# Altium PCB cs301_4--4 holes.PcbDoc
Units mm, origin at the board's own origin, x right, y up, seen from the top; angles counter-clockwise.
Board outline 274.95 x 168.53 mm, 2 copper layers (Top Layer, Bottom Layer); 70 components, 49 nets, 236 pads, 24 vias.
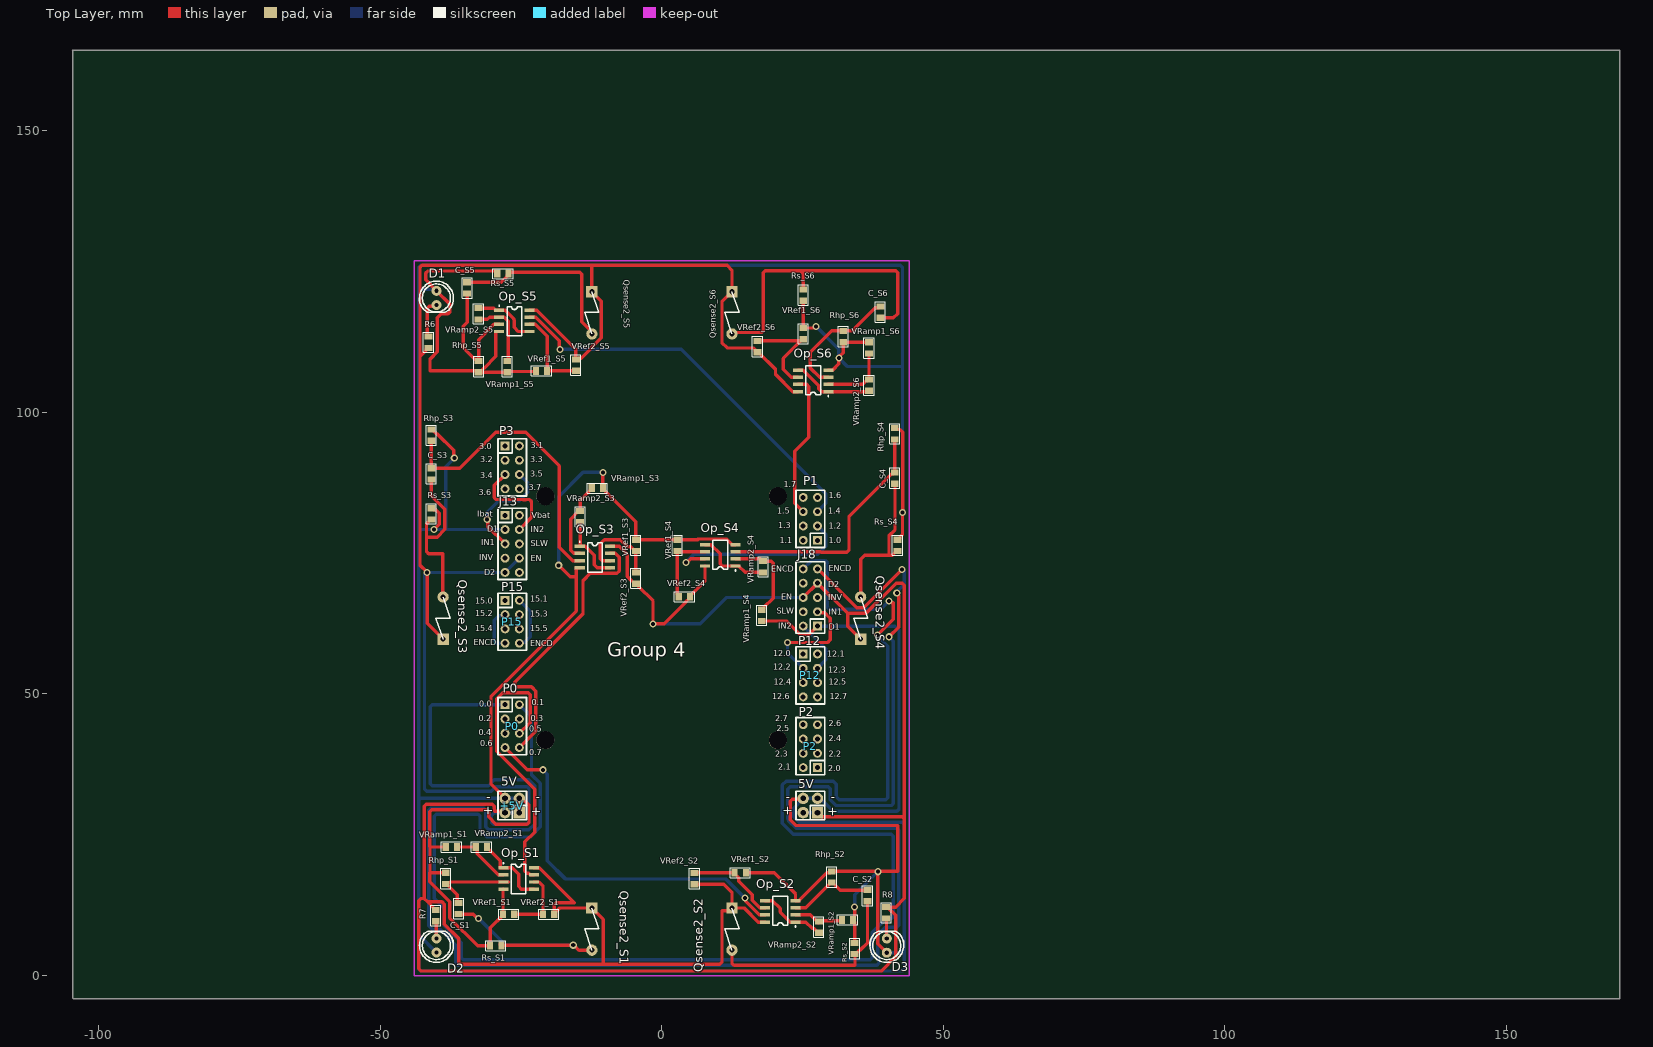
[diagram p0: Top Layer view]
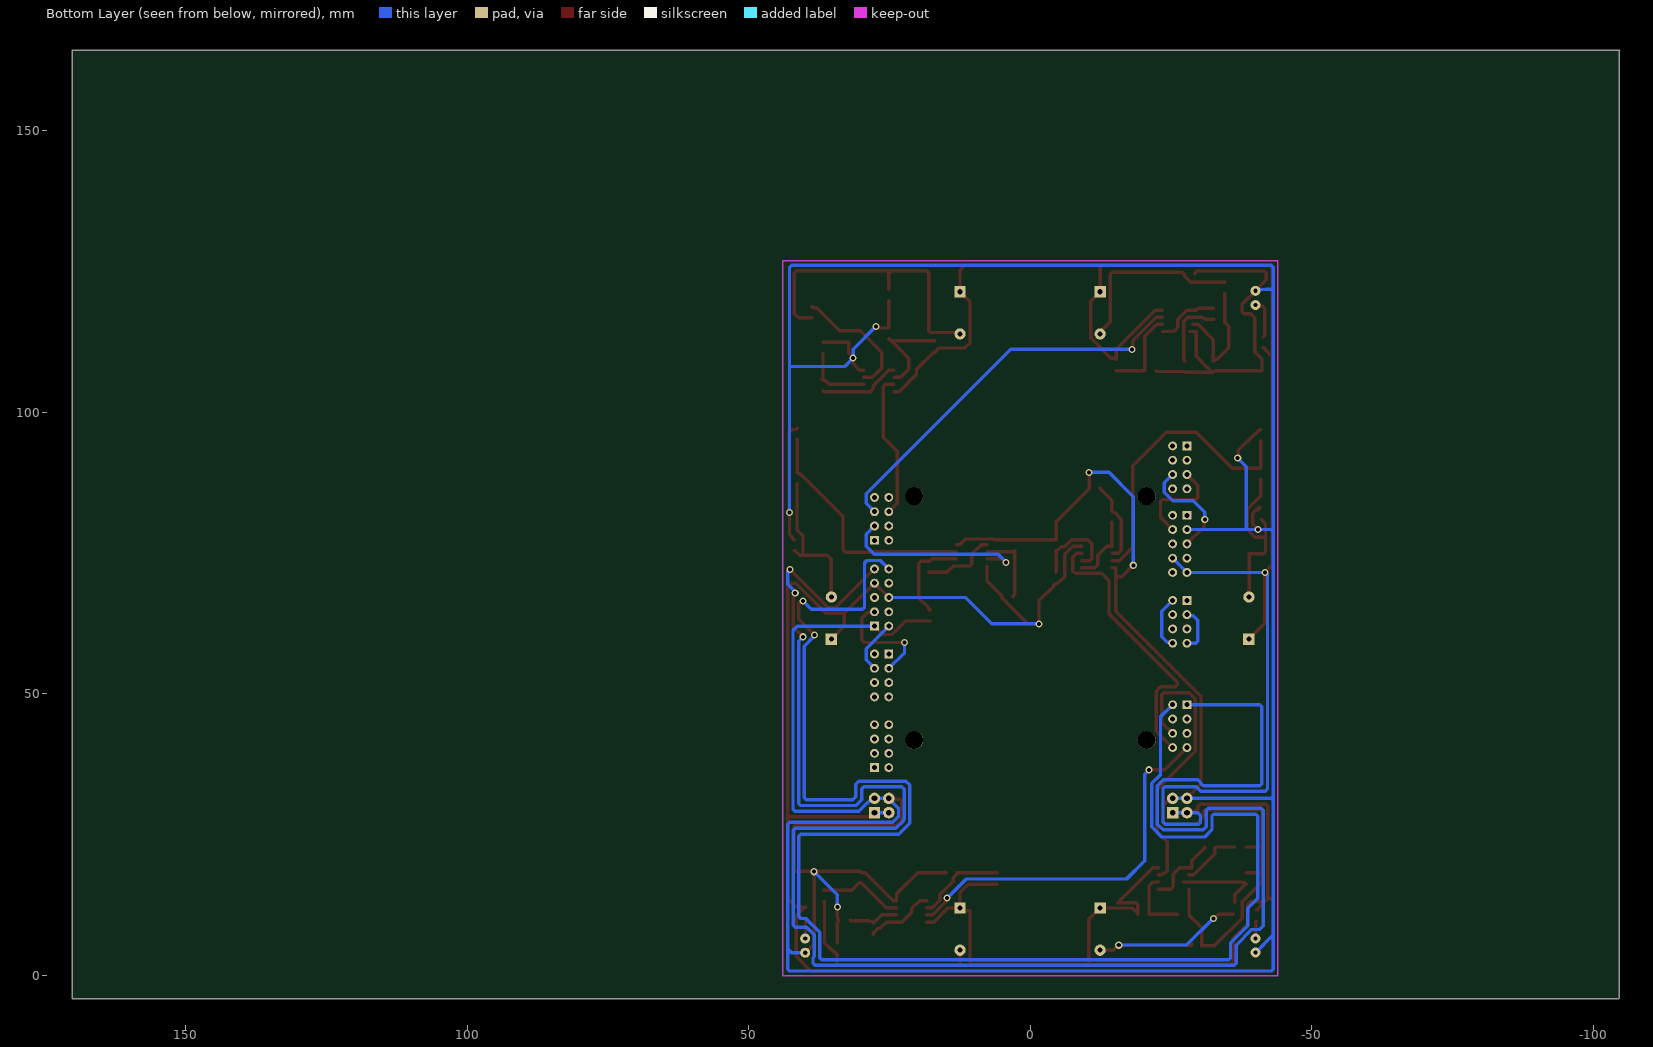
[diagram p1: Bottom Layer view, seen from below]

## Layer stack, top to bottom
Top Solder: solder mask 0.0102, Solder Resist, Dk 3.5
Top Layer: signal copper 0.0356
Dielectric1: dielectric 0.32, FR-4, Dk 4.8
Bottom Layer: signal copper 0.0356
Bottom Solder: solder mask 0.0102, Solder Resist, Dk 3.5

## Board outline
-104.648,-4.064 -104.521,-4.191 170.18,-4.191 170.18,164.338 -104.775,164.338 -104.648,164.211 -104.648,-4.064

## Design rules (kind name [scope] priority, off if disabled: settings)
Clearance [All] p1: gap=0.4 ignorepadtopadclearanceinfootprint=FALSE
Height [All] p1: minheight=0 maxheight=20 prefheight=12.7
HoleSize [All] p1: absolutevalues=TRUE maxlimit=10 minlimit=0.4 maxpercent=80.000 minpercent=20.000
PolygonConnect [All] p1: connectstyle=Relief reliefconductorwidth=0.6 reliefentries=4 polygonreliefangle="90 Angle" airgapwidth=0.4
RoutingVias [All] p1: holewidth=0.711 width=1.27 viastyle="Through Hole" minholewidth=0.711 minwidth=1.27 maxholewidth=0.711 maxwidth=1.27
SilkToSilkClearance [All] p1: silktosilkclearance=0.1
SilkToSolderMaskClearance SilkscreenOverComponentPads [IsPad] p1: minsilkscreentomaskgap=0.1 clearancetoexposedcopper=TRUE
SolderMaskExpansion [All] p1: expansion=0.102 istentingtop=FALSE
Width [All] p1: maxlimit=10 minlimit=0.4 preferedwidth=0.6
26 further rules are at their usual default settings.

## Classes and differential pairs
component class S6: C_S6 Oa12_S6 Op_S6 Qsense2_S6 Rhp_S6 Rs_S6 VRamp1_S6 VRamp2_S6 VRef1_S6 VRef2_S6
component class S5: C_S5 Oa12_S5 Op_S5 Qsense2_S5 Rhp_S5 Rs_S5 VRamp1_S5 VRamp2_S5 VRef1_S5 VRef2_S5
component class S4: C_S4 Oa12_S4 Op_S4 Qsense2_S4 Rhp_S4 Rs_S4 VRamp1_S4 VRamp2_S4 VRef1_S4 VRef2_S4
component class S3: C_S3 Oa12_S3 Op_S3 Qsense2_S3 Rhp_S3 Rs_S3 VRamp1_S3 VRamp2_S3 VRef1_S3 VRef2_S3
component class S2: C_S2 Oa12_S2 Op_S2 Qsense2_S2 Rhp_S2 Rs_S2 VRamp1_S2 VRamp2_S2 VRef1_S2 VRef2_S2
component class S1: C_S1 Oa12_S1 Op_S1 Qsense2_S1 Rhp_S1 Rs_S1 VRamp1_S1 VRamp2_S1 VRef1_S1 VRef2_S1
channel class SensorDesign: S1 S2 S3 S4 S5 S6
component class cs301_4---------------: 5V +5V D1 D2 D3 J13 J18 P0 P1 P2 P3 P12 P15 R6 R7 R8

## Components (designator, comment, footprint, x,y, rotation, side; value= is the part's Value field where it differs from the comment)
5V "5V" IDC4 27.638,28.872 r90 top locked
+5V "5V" IDC4 -25.321,28.872 r90 top locked
C_S1 "680n" "0805 CAP" -36.116,11.854 r90 top (schematic designator C)
C_S2 "680n" "0805 CAP" 36.528,14.124 r90 top (schematic designator C)
C_S3 "680n" "0805 CAP" -40.942,89.07 r90 top (schematic designator C)
C_S4 "680n" "0805 CAP" 41.354,88.308 r90 top (schematic designator C)
C_S5 "680n" "0805 CAP" -34.592,122.09 r270 top (schematic designator C)
C_S6 "680n" "0805 CAP" 38.814,117.788 r90 top (schematic designator C)
D1 "LED" LED0.1/5MM#1 -40.048,119.036 r180 top locked
D2 "LED" LED0.1/5MM#2 -40.048,6.536 r0 top locked
D3 "LED" LED0.1/5MM#1 39.952,6.536 r0 top locked
J13 "CON10" IDC10 -27.861,81.704 r270 top locked
J18 "CON10" IDC10 27.638,62.019 r90 top locked
Op_S1 "LM358" "SO - 8" -25.448,17.188 r0 top (schematic designator Op)
Op_S2 "LM358" "SO - 8" 21.034,11.346 r180 top (schematic designator Op)
Op_S3 "LM358" "SO - 8" -11.902,74.29 r0 top (schematic designator Op)
Op_S4 "LM358" "SO - 8" 10.366,74.592 r180 top (schematic designator Op)
Op_S5 "LM358" "SO - 8" -26.21,116.248 r0 top (schematic designator Op)
Op_S6 "LM358" "SO - 8" 26.876,105.58 r180 top (schematic designator Op)
P0 "P0" idc8 -27.861,48.049 r270 top locked
P1 "P1" idc8 27.638,77.259 r90 top locked
P2 "P2" idc8 27.638,36.873 r90 top locked
P3 "P3" idc8 -27.861,94.023 r270 top locked
P12 "P12" idc8 25.098,57.066 r270 top locked
P15 "P15" IDC8 -27.861,66.591 r270 top locked
Qsense2_S1 "VEMT3700" VEMT3700 -16.256,14.478 r270 top (schematic designator Qsense2)
Qsense2_S2 "VEMT3700" VEMT3700 8.636,14.478 r270 top (schematic designator Qsense2)
Qsense2_S3 "VEMT3700" VEMT3700 -35.052,57.15 r90 top (schematic designator Qsense2)
Qsense2_S4 "VEMT3700" VEMT3700 39.116,57.15 r90 top (schematic designator Qsense2)
Qsense2_S5 "VEMT3700" VEMT3700 -16.256,123.952 r270 top (schematic designator Qsense2)
Qsense2_S6 "VEMT3700" VEMT3700 8.636,123.952 r270 top (schematic designator Qsense2)
R6 "1k" "0805 RES" -41.45,112.438 r90 top
R7 "1k" "0805 RES" -40.18,10.584 r270 top
R8 "1k" "0805 RES" 39.83,11.092 r270 top
Rhp_S1 "2k" "0805 RES" -38.402,17.188 r90 top (schematic designator Rhp)
Rhp_S2 "2k" "0805 RES" 30.178,17.442 r90 top (schematic designator Rhp)
Rhp_S3 "2k" "0805 RES" -40.942,95.928 r90 top (schematic designator Rhp)
Rhp_S4 "2k" "0805 RES" 41.354,96.182 r90 top (schematic designator Rhp)
Rhp_S5 "2k" "0805 RES" -32.56,108.12 r270 top (schematic designator Rhp)
Rhp_S6 "2k" "0805 RES" 32.21,113.454 r270 top (schematic designator Rhp)
Rs_S1 "100k" "0805 RES" -29.512,5.25 r180 top (schematic designator Rs)
Rs_S2 "100k" "0805 RES" 34.242,4.742 r90 top (schematic designator Rs)
Rs_S3 "100k" "0805 RES" -40.942,81.958 r90 top (schematic designator Rs)
Rs_S4 "100k" "0805 RES" 41.862,76.37 r90 top (schematic designator Rs)
Rs_S5 "100k" "0805 RES" -28.242,124.63 r180 top (schematic designator Rs)
Rs_S6 "100k" "0805 RES" 25.098,120.82 r270 top (schematic designator Rs)
VRamp1_S1 "12k" "0805 RES" -37.386,22.776 r180 top (schematic designator VRamp1)
VRamp1_S2 "12k" "0805 RES" 32.972,9.822 r0 top (schematic designator VRamp1)
VRamp1_S3 "12k" "0805 RES" -11.478,86.53 r0 top (schematic designator VRamp1)
VRamp1_S4 "12k" "0805 RES" 17.732,63.924 r270 top (schematic designator VRamp1)
VRamp1_S5 "12k" "0805 RES" -27.48,108.12 r270 top (schematic designator VRamp1)
VRamp1_S6 "12k" "0805 RES" 36.782,111.422 r90 top (schematic designator VRamp1)
VRamp2_S1 "Res_SMT_0805" "0805 RES" -32.052,22.776 r0 top value=220k (schematic designator VRamp2)
VRamp2_S2 "Res_SMT_0805" "0805 RES" 27.892,8.552 r270 top value=220k (schematic designator VRamp2)
VRamp2_S3 "Res_SMT_0805" "0805 RES" -14.526,81.45 r270 top value=220k (schematic designator VRamp2)
VRamp2_S4 "Res_SMT_0805" "0805 RES" 17.986,72.56 r270 top value=220k (schematic designator VRamp2)
VRamp2_S5 "Res_SMT_0805" "0805 RES" -32.589,117.502 r90 top value=220k (schematic designator VRamp2)
VRamp2_S6 "Res_SMT_0805" "0805 RES" 36.782,104.818 r270 top value=220k (schematic designator VRamp2)
VRef1_S1 "12k" "0805 RES" -27.226,10.838 r180 top (schematic designator VRef1)
VRef1_S2 "12k" "0805 RES" 13.922,18.204 r0 top (schematic designator VRef1)
VRef1_S3 "12k" "0805 RES" -4.62,76.37 r90 top (schematic designator VRef1)
VRef1_S4 "12k" "0805 RES" 2.746,76.37 r90 top (schematic designator VRef1)
VRef1_S5 "12k" "0805 RES" -21.384,107.358 r180 top (schematic designator VRef1)
VRef1_S6 "12k" "0805 RES" 25.098,113.962 r90 top (schematic designator VRef1)
VRef2_S1 "220k" "0805 RES" -20.114,10.838 r180 top (schematic designator VRef2)
VRef2_S2 "220k" "0805 RES" 5.794,17.172 r90 top (schematic designator VRef2)
VRef2_S3 "220k" "0805 RES" -4.62,70.528 r90 top (schematic designator VRef2)
VRef2_S4 "220k" "0805 RES" 4,67.226 r180 top (schematic designator VRef2)
VRef2_S5 "220k" "0805 RES" -15.288,108.374 r270 top (schematic designator VRef2)
VRef2_S6 "220k" "0805 RES" 16.97,111.676 r90 top (schematic designator VRef2)

## Footprints (in the part's own frame and the unit in brackets; to place one, negate y for a bottom-side part, rotate by r counter-clockwise, add the part's x,y. Pads: shape width x height; smd on the part's side, far side on the other; paste and mask are expansions set on the pad)
"0805 CAP" [mm] "http://www.digikey.co.nz/Web%20Export/Supplier%20Content/Vishay_8026/PDF/VishayBeyschlag_SolderPad.pdf?redirected=1 with dimension G modified by +0.25mm"
  rect 1.1x1.4 smd: 1(-1,0) 2(1,0)
  silkscreen extent -1.8,-0.9 1.8,0.9, body extent -1.04,-0.66 1.04,0.66, height 0.61
"0805 RES" [mm] "http://www.digikey.co.nz/Web%20Export/Supplier%20Content/Vishay_8026/PDF/VishayBeyschlag_SolderPad.pdf?redirected=1 with dimension G modified by +0.25mm"
  rect 1.1x1.4 smd: 1(-1,0) 2(1,0)
  silkscreen extent -1.8,-0.9 1.8,0.9, body extent -1.04,-0.66 1.04,0.66, height 0.61
IDC4 [mil]
  rect 80x80 hole 40: 1(0,0)
  round 80 hole 40: 2(0,100) 3(100,0) 4(100,100)
  silkscreen extent -50,-50 150,150
idc8 [mil]
  rect 62x62 hole 35: 1(0,0)
  round 62 hole 35: 2(0,100) 3(100,0) 4(100,100) 5(200,0) 6(200,100) 7(300,0) 8(300,100)
  silkscreen extent -50,-50 350,150
IDC8 [mil]
  rect 62x62 hole 35: 1(0,0)
  round 62 hole 35: 2(0,100) 3(100,0) 4(100,100) 5(200,0) 6(200,100) 7(300,0) 8(300,100)
  silkscreen extent -50,-50 350,150
IDC10 [mil]
  rect 62x62 hole 35: 1(0,0)
  round 62 hole 35: 2(0,100) 3(100,0) 4(100,100) 5(200,0) 6(200,100) 7(300,0) 8(300,100) 9(400,0) 10(400,100)
  silkscreen extent -50,-50 450,150
LED0.1/5MM#1 [mil]
  round 70 hole 30: A(0,0) K(0,-100)
  silkscreen extent -118,-168 118,50
LED0.1/5MM#2 [mil]
  round 70 hole 30: A(0,0) K(0,-98.43)
  silkscreen extent -118,-168 118,50
"SO - 8" [mm]
  rect 1.8x0.6 smd: 1(-2.7,1.905) 2(-2.7,0.635) 3(-2.7,-0.635) 4(-2.7,-1.905) 5(2.7,-1.905) 6(2.7,-0.635) 7(2.7,0.635) 8(2.7,1.905)
  silkscreen extent -2.8,-2.7 1.3,2.8, body extent -3.1,-2.5 3.1,2.5, height 1.8
VEMT3700 [mm]
  rect 2x2 hole 0.9: 1(2.54,3.81)
  round 2 hole 0.9: 2(10.033,3.81)
  silkscreen extent 2.54,2.54 10.03,5.08

## Part data
5V +5V: library part CON4, "Connector"
C_S1 C_S2 C_S3 C_S4 C_S5 C_S6: library part CerCap_SMT_0805, "SMT ceramic capacitor 0805 size"
J13 J18: "Connector"
Op_S1 Op_S2 Op_S3 Op_S4 Op_S5 Op_S6: library part LM358_SMT_SOIC8, "IC OPAMP 8SOIC", Supplier Part Number 1=296-1014-1-ND, ComponentLink1Description=http://www.ti.com/lit/ds/symlink/tlc080a.pdf, ComponentLink1URL=http://www.ti.com/lit/ds/symlink/tlc080a.pdf, Supplier 1=Digi-Key
P0 P1 P2 P3: library part CON8, "Connector"
P12 P15: library part CON8_1, "Connector"
Qsense2_S1 Qsense2_S2 Qsense2_S3 Qsense2_S4 Qsense2_S5 Qsense2_S6: "Silicon NPN Phototransistor"
R6 R7 R8 Rhp_S1 Rhp_S2 Rhp_S3 Rhp_S4 Rhp_S5 Rhp_S6 Rs_S1 Rs_S2 Rs_S3 Rs_S4 Rs_S5 Rs_S6 VRamp1_S1 VRamp1_S2 VRamp1_S3 VRamp1_S4 VRamp1_S5 VRamp1_S6 VRef1_S1 VRef1_S2 VRef1_S3 VRef1_S4 VRef1_S5 VRef1_S6 VRef2_S1 VRef2_S2 VRef2_S3 VRef2_S4 VRef2_S5 VRef2_S6: library part Res_SMT_0805, "0805 resistor", ComponentLink1Description=https://nz.mouser.com/datasheet/2/315/AOA0000C304-1149620.pdf, LatestRevisionDate=17-Jul-2002, LatestRevisionNote="Re-released for DXP Platform.", PackageReference=AXIAL-0.4, Published=8-Jun-2000, Publisher="Altium Limited"
VRamp2_S1 VRamp2_S2 VRamp2_S3 VRamp2_S4 VRamp2_S5 VRamp2_S6: library part CMP-009-000002-1, "0805 resistor", Component Type=Standard, Design Item ID=Res_SMT_0805, LatestRevisionDate=17-Jul-2002, LatestRevisionNote="Re-released for DXP Platform.", PackageReference=AXIAL-0.4, Pin Count=2, Published=8-Jun-2000, Publisher="Altium Limited", Source=EE209_SchLib.SchLib

## Free pads (board coordinates)
  round 3.2 hole 3.2 unplated: 1(-20.698,41.75) 1(-20.698,85.082) 1(20.602,41.75) 1(20.602,85.082)

## Via types
v1: diameter 1.27, hole 0.711, Top Layer to Bottom Layer, 24 vias

## Nets (pads, with @x,y where several pads share a name; then routed paths per layer and width w, separated by ;. In a path a pad name is that pad's centre, name@x,y a point inside that pad or via, vN(x,y) a via of type N, cw(c..) or ccw(c..) an arc to the next point about the centre after c; other vN are vias at no path point)
5V_S1: 5V.1 5V.2 +5V.1 +5V.2 J13.8 J13.9 J18.6 J18.7 Op_S1.8 Op_S2.8 Op_S3.8 Op_S4.8 Op_S5.8 Op_S6.8 Qsense2_S1.1 Qsense2_S2.1 Qsense2_S3.1 Qsense2_S4.1 Qsense2_S5.1 Qsense2_S6.1 R6.1 R7.1 R8.1 VRef2_S1.1 VRef2_S2.1 VRef2_S3.1 VRef2_S4.1 VRef2_S5.1 VRef2_S6.1 | length 719.7
  Top Layer w0.6: R6.1 -41.6,111.438 -41.85,111.188 -41.85,111.038 -42.812,110.076 -42.974,110.239 ; R7.1 -40.33,11.584 -40.58,11.834 -40.58,11.984 -41.618,13.022 ; Qsense2_S3.1 -41.704,62.532 v1(-41.704,71.544) -42.974,72.814 -42.974,110.239 ; +5V.2 -28.135,29.146 -29.689,29.146 -29.766,29.223 -29.766,30.045 -30.117,30.396 -41.861,30.396 -42.212,30.045 -42.212,13.616 ; Op_S5.8 -22.239,118.153 -15.288,111.202 VRef2_S5.1 -15.038,109.624 -14.337,109.624 -10.746,113.215 -10.746,119.712 Qsense2_S5.1 -12.446,126.089 ; Op_S1.8 -21.765,19.093 -15.542,12.87 -18.747,12.87 -19.098,12.519 VRef2_S1.1@-19.098,11.004 ; VRef2_S1.1 -19.114,10.988 VRef2_S1.1@-19.098,11.004 ; Op_S3.8 -7.603,76.195 -6.16,74.752 -6.16,70.828 -5.596,70.264 -5.506,70.264 -4.77,69.528 VRef2_S3.1 -4.47,69.528 -4.22,69.278 -4.22,69.128 -1.572,66.48 v1(-1.572,62.4) 0.414,62.4 4.264,66.25 4.264,66.34 5,67.076 VRef2_S4.1 5,67.376 7.666,70.042 Op_S4.8 ; VRef2_S2.1 11.006,16.172 12.446,14.732 Qsense2_S2.1 ; Op_S2.8 17.126,9.441 14.629,11.938 Qsense2_S2.1 ; Op_S6.8 23.256,103.675 20.178,106.753 20.178,107.618 17.12,110.676 VRef2_S6.1 16.82,110.676 16.57,110.926 16.57,111.075 16.219,111.426 11.607,111.426 10.668,112.365 10.668,119.634 Qsense2_S6.1 12.446,125.222 11.579,126.089 -12.446,126.089 ; J18.6 J18.7 32.999,64.278 ; 5V.1 28.354,28.156 42.716,28.156 43.067,27.805 ; Qsense2_S4.1 32.999,61.997 32.999,64.278 ; R8.1 R8.1@39.98,12.092 ; -42.974,110.239 -42.974,125.738 -42.623,126.089 -12.446,126.089 ; -42.212,13.616 -41.618,13.022 ; -42.212,13.616 -42.812,13.616 -43.163,13.265 -43.163,1.186 -42.72,0.743 38.946,0.743 41.541,3.338 41.541,10.621 40.806,11.356 40.716,11.356 R8.1@39.98,12.092 ; -41.618,13.022 -39.062,13.022 -38.656,12.616 -38.656,9.06 -36.116,6.52 -36.116,2.299 -35.765,1.948 -10.414,1.948 ; VRef2_S1.1@-19.098,11.004 -18.164,11.938 Qsense2_S1.1 -10.414,9.906 -10.414,1.948 ; -10.414,1.948 10.317,1.948 10.668,2.299 10.668,10.922 10.673,10.927 10.673,11.425 11.933,11.425 Qsense2_S2.1 ; 32.999,64.278 36.256,64.278 41.617,69.639 42.686,69.639 43.067,69.258 43.067,27.805 ; R8.1@39.98,12.092 41.527,12.092 43.067,13.632 43.067,27.805
  Bottom Layer w0.6: +5V.1 +5V.2 -27.872,28.861 -29.777,28.861 -30.274,28.364 -30.274,27.191 -29.923,26.84 -24.021,26.84 -23.605,27.256 -23.605,33.093 -23.956,33.444 -29.512,33.444 -30.274,32.682 -41.812,32.682 -42.163,33.033 -42.163,71.193 -41.812,71.544 v1(-41.704,71.544) J13.9 J13.8 ; v1(-1.572,62.4) 6.81,62.4 11.509,67.099 J18.6 ; 5V.2 5V.1
GND: 5V.3 5V.4 +5V.3 +5V.4 D1.K D2.K D3.K J13.3 J18.1 Op_S1.4 Op_S2.4 Op_S3.4 Op_S4.4 Op_S5.4 Op_S6.4 Rhp_S1.2 Rhp_S2.2 Rhp_S3.2 Rhp_S4.2 Rhp_S5.2 Rhp_S6.2 Rs_S1.2 Rs_S2.2 Rs_S3.2 Rs_S4.2 Rs_S5.2 Rs_S6.2 VRamp1_S1.2 VRamp1_S2.2 VRamp1_S3.2 VRamp1_S4.2 VRamp1_S5.2 VRamp1_S6.2 VRef1_S1.2 VRef1_S2.2 VRef1_S3.2 VRef1_S4.2 VRef1_S5.2 VRef1_S6.2 | length 932.4
  Top Layer w0.6: Rhp_S3.2 -40.792,96.928 -40.042,96.178 -39.952,96.178 -37.006,93.232 -37.006,91.992 v1(-36.878,91.864) ; Rs_S3.2@-40.813,83.01 -40.605,83.145 -40.605,82.771 -40.542,82.708 -40.168,82.708 -39.542,82.082 -39.542,80.118 -40.477,79.184 v1(-40.477,79.164) ; Rhp_S1.2@-38.394,18.196 Rhp_S1.2 -41.196,18.188 ; VRamp1_S1.2@-38.394,22.768 VRamp1_S1.2 -41.196,22.776 ; Rs_S5.2 -29.242,124.78 -29.492,125.03 -29.642,125.03 -29.701,125.089 -41.623,125.089 -41.974,124.738 -41.974,123.502 D1.K -37.64,119.168 -37.64,117.869 -37.991,117.518 -39.164,117.518 -39.926,116.756 -39.926,110.722 -41.196,109.452 -41.196,107.358 -32.798,107.358 Rhp_S5.2 Rhp_S5.2@-32.41,107.12 ; Op_S5.4@-28.31,114.343 Op_S5.4 -29.51,114.343 -29.51,109.93 -31.584,107.856 -31.674,107.856 Rhp_S5.2@-32.41,107.12 ; Op_S1.4 -28.226,15.283 VRef1_S1.2 -28.226,10.688 -30.512,8.402 Rs_S1.2 -32.752,5.25 -37.656,10.154 -37.656,13.03 -41.212,16.586 -41.212,18.204 -41.196,18.188 ; +5V.4 -30.348,33.899 -30.348,49.541 -15.202,64.687 -15.202,70.782 ; +5V.3 -24.934,31.412 -24.124,30.602 -24.029,30.602 -23.605,30.178 -23.605,27.191 -23.956,26.84 -29.512,26.84 -30.782,28.11 -30.782,29.029 -31.149,29.396 -40.861,29.396 -41.212,29.045 -41.212,22.776 -41.196,22.776 ; VRef1_S5.2 -22.503,107.239 -27.361,107.239 VRamp1_S5.2 Rhp_S5.2@-32.41,107.12 ; v1(-18.336,72.814) -16.304,70.782 -15.202,70.782 ; Op_S3.4 -15.202,72.385 -15.202,70.782 ; v1@-10.478,89.324 VRamp1_S3.2 -10.478,86.38 -4.62,80.522 VRef1_S3.2 VRef1_S4.2 6.349,77.37 6.476,77.497 11.466,77.497 12.466,76.497 Op_S4.4 ; VRef1_S2.2@15.041,18.323 VRef1_S2.2 19.959,18.204 23.734,14.429 Op_S2.4 24.334,13.251 29.275,18.192 29.928,18.192 Rhp_S2.2 v1@38.306,18.442 ; VRamp1_S4.2 22.09,62.924 24.482,60.532 26.151,60.532 J18.1 ; 5V.4 24.96,31.274 23.182,31.274 22.812,30.904 22.812,27.602 23.828,26.586 41.862,26.586 41.862,18.458 41.846,18.442 v1@38.306,18.442 ; Rs_S6.2 VRef1_S6.2 26.933,114.962 27.203,115.232 v1(27.384,115.232) ; Op_S6.4 30.305,107.485 31.448,108.628 v1(31.448,109.644) 31.448,109.825 32.21,110.587 Rhp_S6.2 32.242,112.422 VRamp1_S6.2 ; Rs_S2.2@34.234,5.75 Rs_S2.2 34.242,9.402 33.972,9.672 VRamp1_S2.2 34.222,10.072 34.222,10.553 34.242,10.573 v1(34.242,12.108) ; D3.K 38.363,5.585 v1(38.363,18.385) v1@38.306,18.442 ; Rhp_S4.2 41.604,96.932 42.292,96.932 42.754,96.47 42.754,82.234 v1(42.732,82.212) 42.732,78.24 42.262,77.77 42.262,77.62 42.012,77.37 Rs_S4.2 ; -41.196,18.188 -41.196,22.776
  Bottom Layer w0.6: D2.K -43.163,7.151 ; D1.K -40.273,121.801 -41.792,121.801 -41.827,121.836 -42.812,121.836 -43.163,121.485 ; v1(-36.878,91.864) -38.402,90.34 -38.402,79.164 ; J13.3 -38.402,79.164 ; +5V.3 +5V.4 -42.812,31.412 -43.163,31.061 ; v1(-18.336,72.814) -18.336,85.006 -14.018,89.324 v1(-10.462,89.324) ; v1(27.384,115.232) 31.437,111.179 31.437,109.655 v1(31.448,109.644) 32.972,108.12 42.732,108.12 ; J18.1 41.384,62.019 42.116,61.287 42.116,29.477 41.765,29.126 30.406,29.126 28.93,30.602 28.835,30.602 28.025,31.412 5V.3 5V.4 23.382,29.696 23.382,28.161 24.387,27.156 42.716,27.156 43.067,26.805 43.067,4.677 ; v1(34.242,12.108) 34.242,14.264 v1(38.363,18.385) ; D3.K 42.386,3.996 43.067,4.677 ; v1(42.732,82.212) 42.732,108.12 ; -43.163,7.151 -43.163,31.061 ; -43.163,7.151 -43.163,1.094 -42.812,0.743 42.716,0.743 43.067,1.094 43.067,4.677 ; -43.163,31.061 -43.163,78.813 ; -43.163,78.813 -43.163,121.485 ; -43.163,78.813 -42.812,79.164 v1(-40.477,79.164) -38.402,79.164 ; -43.163,121.485 -43.163,125.738 -42.812,126.089 42.381,126.089 42.732,125.738 42.732,108.12
M1IN1: J13.5 P3.6 | length 19.4
  Top Layer w0.6: v1(-31.036,80.942) -30.908,80.814 -30.908,79.671 J13.5
  Bottom Layer w0.6: v1(-31.036,80.942) -31.036,82.212 -28.964,84.284 -25.336,84.284 -23.834,85.787 -23.834,87.456 P3.6
M1IN2: J13.4 P3.5 | length 17.7
  Top Layer w0.6: P3.5 -29.766,87.038 -29.766,84.849 -29.415,84.498 -24.686,84.498 -24.681,84.493 -24.183,84.493 -24.178,84.498 -23.513,84.498 -23.162,84.147 -23.162,81.323 J13.4
M1QA: P15.2 P15.8 | length 9.6
  Bottom Layer w0.6: P15.8 -25.134,59.158 -24.372,59.158 -23.416,60.114 -23.416,64.686 P15.2
M1QB: P15.3 P15.7 | length 8.1
  Bottom Layer w0.6: P15.7 -29.415,58.971 -29.766,59.322 -29.766,63.065 -28.966,63.864 -28.048,63.864 P15.3
M2IN1: J18.3 P12.3 | length 20.1
  Top Layer w0.6: v1(22.304,59.098) 29.416,59.098 29.924,59.606 29.924,63.416 28.968,64.372 27.825,64.372 J18.3
  Bottom Layer w0.6: v1(22.304,59.098) 22.304,57.295 25.073,54.526 P12.3
M2IN2: J18.2 P12.4 | length 9.8
  Bottom Layer w0.6: J18.2 25.098,61.994 29.125,57.967 29.125,56.013 P12.4
M2QA: J18.9 P0.1 | length 319.6
  Top Layer w0.6: J18.9 27.672,72.179 34.573,65.278 35.842,65.278 42.616,72.052 v1(42.624,72.052) ; v1(40.338,60.114) 42.067,61.843 42.067,67.529 v1(41.731,67.865)
  Bottom Layer w0.6: P0.1 -40.812,48.049 -41.163,47.698 -41.163,34.033 -40.812,33.682 -30.798,33.682 -29.766,34.714 -23.67,34.714 -22.605,33.649 -22.605,26.842 -23.623,25.824 -30.782,25.824 -31.29,26.332 -31.29,29.283 -31.641,29.634 -41.099,29.634 -41.45,29.283 -41.45,8.806 -40.769,8.125 -39.39,8.125 -36.624,5.359 -36.624,2.094 -36.273,1.743 38.209,1.743 38.56,2.094 38.56,3.141 38.363,3.338 38.363,7.194 39.721,8.552 41.716,8.552 42.067,8.903 42.067,25.727 41.716,26.078 23.828,26.078 22.558,27.348 22.558,27.571 22.382,27.747 22.382,33.014 22.812,33.444 29.573,33.444 29.924,33.093 29.924,31.158 30.94,30.142 40.765,30.142 41.116,30.493 41.116,59.336 v1(40.338,60.114) ; v1(41.731,67.865) 41.731,68.046 42.066,68.381 42.066,68.446 43.067,69.447 43.067,71.863 v1@42.878,72.052
M2QB: J18.10 P0.2 | length 281.7
  Top Layer w0.6: v1(38.306,60.44) 41.067,63.201 41.067,66.157 40.861,66.157 40.533,66.486 v1(40.351,66.486)
  Bottom Layer w0.6: P0.2 -23.162,45.89 -23.162,35.62 -21.605,34.063 -21.605,26.365 -23.416,24.554 -31.036,24.554 -32.306,25.824 -32.306,28.267 -32.657,28.618 -40.099,28.618 -40.45,28.267 -40.45,13.648 -38.656,11.854 -38.656,8.806 -35.608,5.758 -35.608,3.094 -35.257,2.743 37.012,2.743 37.363,3.094 37.363,7.608 39.831,10.076 40.716,10.076 41.067,10.427 41.067,24.711 40.716,25.062 23.32,25.062 21.382,27 21.382,33.792 22.05,34.46 30.432,34.46 30.94,33.952 30.94,31.666 31.464,31.142 39.765,31.142 40.116,31.493 40.116,58.448 38.306,60.258 v1(38.306,60.44) v1@38.306,60.622 ; J18.10 26.585,73.666 28.974,73.666 29.416,73.225 29.416,65.375 29.767,65.024 38.89,65.024 v1(40.351,66.486)
NetC_S1_1: C_S1.1 Qsense2_S1.2 Rs_S1.1 | length 39.7
  Top Layer w0.6: C_S1.1@-36.108,10.846 C_S1.1 -33.519,10.854 -32.741,10.076 v1(-32.56,10.076) ; Rs_S1.1@-28.762,5.5 Rs_S1.1 -28.449,5.313 -15.606,5.313 -14.737,4.445 Qsense2_S1.2
  Bottom Layer w0.6: v1(-32.56,10.076) -27.861,5.377 v1@-15.796,5.377 ; Qsense2_S1.2@-12.7,4.445 Qsense2_S1.2
  other v1: -15.748,5.334
NetC_S1_2: C_S1.2 Op_S1.3 Rhp_S1.1 | length 15.5
  Top Layer w0.6: C_S1.2@-36.336,12.924 -36.368,12.956 -36.368,14.304 -38.252,16.188 Rhp_S1.1 -38.152,16.438 -37.766,16.438 -37.651,16.553 Op_S1.3 -27.228,16.553
NetC_S2_1: C_S2.1 Qsense2_S2.2 Rs_S2.1 | length 37.2
  Top Layer w0.6: Qsense2_S2.2@12.446,4.647 12.446,2.094 12.797,1.743 34.291,1.743 34.291,3.693 Rs_S2.1 34.392,3.742 35.128,4.478 35.218,4.478 36.528,5.788 C_S2.1 C_S2.1@36.658,12.994
NetC_S2_2: C_S2.2 Op_S2.3 Rhp_S2.1 | length 15.3
  Top Layer w0.6: Op_S2.3 25.567,11.981 30.028,16.442 Rhp_S2.1 30.328,16.442 31.646,15.124 C_S2.2 C_S2.2@36.678,15.124
NetC_S3_1: C_S3.1 Qsense2_S3.2 Rs_S3.1 | length 30.7
  Top Layer w0.6: Rs_S3.1 -41.092,80.958 -41.812,80.238 -41.812,77.64 ; C_S3.1 -40.942,85.198 -38.542,82.798 -38.542,79.211 -39.924,77.829 -41.623,77.829 -41.812,77.64 ; Qsense2_S3.2 -38.91,67.231 -38.91,74.846 -41.46,74.846 -41.812,75.197 -41.812,77.64
NetC_S3_2: C_S3.2 Op_S3.3 Rhp_S3.1 | length 51.7
  Top Layer w0.6: Rhp_S3.1 C_S3.2 -35.878,90.07 -29.512,96.436 -24.178,96.436 -18.206,90.464 -18.206,76.041 -15.82,73.655 Op_S3.3
NetC_S4_1: C_S4.1 Qsense2_S4.2 Rs_S4.1 | length 27.1
  Top Layer w0.6: Qsense2_S4.2 35.306,73.878 36.02,74.592 40.338,74.592 ; C_S4.1 41.397,87.265 41.397,80.974 41.416,80.955 41.416,79.164 40.338,78.086 40.338,74.592 ; Rs_S4.1 41.712,75.37 40.934,74.592 40.338,74.592
NetC_S4_2: C_S4.2 Op_S4.3 Rhp_S4.1 | length 43.6
  Top Layer w0.6: Op_S4.3 28.171,75.227 28.298,75.1 32.875,75.1 33.226,75.451 33.226,81.42 40.864,89.058 41.104,89.058 C_S4.2 Rhp_S4.1
NetC_S5_1: C_S5.1 Qsense2_S5.2 Rs_S5.1 | length 32.7
  Top Layer w0.6: C_S5.1 -28.542,123.09 -27.492,124.14 -27.492,124.384 -26.992,124.884 -14.575,124.884 -14.224,124.533 -14.224,116.078 -12.999,114.853 -12.999,114.851 -12.446,114.298 Qsense2_S5.2
NetC_S5_2: C_S5.2 Op_S5.3 Rhp_S5.1 | length 22.2
  Top Layer w0.6: C_S5.2 -34.592,115.978 -35.318,115.252 -35.318,111.448 -33.26,109.39 -32.98,109.39 -32.71,109.12 Rhp_S5.1 -32.56,112.883 -29.83,115.613 Op_S5.3
NetC_S6_1: C_S6.1 Qsense2_S6.2 Rs_S6.1 | length 54.3
  Top Layer w0.6: Qsense2_S6.2@12.446,114.173 17.773,114.173 18.034,114.434 18.034,124.787 18.385,125.138 24.59,125.138 ; Rs_S6.1 25.098,124.63 24.59,125.138 ; C_S6.1 41.132,116.788 41.862,117.518 41.862,124.787 41.511,125.138 24.59,125.138
NetC_S6_2: C_S6.2 Op_S6.3 Rhp_S6.1 | length 22.5
  Top Layer w0.6: Op_S6.3 28.019,106.215 26.368,107.866 26.368,110.66 30.178,114.47 32.194,114.47 Rhp_S6.1 33.81,114.454 37.894,118.538 38.564,118.538 C_S6.2
NetD1_A: D1.A R6.2 | length 7
  Top Layer w0.6: R6.2 -41.454,113.438 -41.704,113.688 -41.704,118.459 -41.353,118.811 -40.273,118.811 D1.A
NetD2_A: D2.A R7.2 | length 3.1
  Top Layer w0.6: R7.2 -40.114,9.518 -40.114,6.602 D2.A
NetD3_A: D3.A R8.2 | length 3.6
  Top Layer w0.6: R8.2 39.891,10.031 39.891,6.597 D3.A
NetOp_S1_1: Op_S1.1 Op_S1.5 VRamp2_S1.2 | length 13.5
  Top Layer w0.6: VRamp2_S1.2 -31.052,22.626 -28.748,20.322 -28.748,19.093 Op_S1.1 -26.591,19.093 -25.448,17.95 -25.448,15.761 -24.97,15.283 Op_S1.5
NetOp_S1_2: Op_S1.2 VRamp1_S1.1 VRamp2_S1.1 | length 10.9
  Top Layer w0.6: VRamp1_S1.1@-36.378,22.768 VRamp1_S1.1 VRamp2_S1.1 -32.802,22.526 -32.802,21.557 -29.068,17.823 Op_S1.2
NetOp_S1_6: Op_S1.6 VRef1_S1.1 VRef2_S1.2 | length 12
  Top Layer w0.6: VRef1_S1.1 VRef2_S1.2 -21.114,15.839 -21.828,16.553 Op_S1.6
NetOp_S2_1: Op_S2.1 Op_S2.5 VRamp2_S2.2 | length 12.5
  Top Layer w0.6: Op_S2.5 19.637,13.251 21.034,11.854 21.034,11.221 22.814,9.441 25.534,9.441 26.673,8.302 26.992,8.302 27.742,7.552 VRamp2_S2.2 ; VRamp2_S2.2@27.765,7.425 VRamp2_S2.2@27.892,7.298
NetOp_S2_2: Op_S2.2 VRamp1_S2.1 VRamp2_S2.1 | length 9
  Top Layer w0.6: Op_S2.2 26.329,10.711 27.742,9.298 27.892,9.298 28.142,9.548 28.519,9.548 28.643,9.672 31.822,9.672 VRamp1_S2.1
NetOp_S2_6: Op_S2.6 VRef1_S2.1 VRef2_S2.2 | length 16.1
  Top Layer w0.6: VRef2_S2.2 5.81,18.188 12.906,18.188 VRef1_S2.1 12.922,18.054 13.672,17.304 13.672,16.664 16.067,14.269 16.067,13.328 17.414,11.981 Op_S2.6
NetOp_S3_1: Op_S3.1 Op_S3.5 VRamp2_S3.2 | length 12.2
  Top Layer w0.6: Op_S3.1 Op_S3.1@-14.526,76.195 ; VRamp2_S3.2 Op_S3.1@-14.526,76.195 ; Op_S3.5 -11.46,72.385 -11.986,72.911 -11.986,74.592 -13.589,76.195 Op_S3.1@-14.526,76.195
NetOp_S3_2: Op_S3.2 VRamp1_S3.1 VRamp2_S3.1 | length 14.6
  Top Layer w0.6: Op_S3.2 -15.676,74.925 -16.202,75.451 -16.202,81.014 -15.016,82.2 -14.776,82.2 VRamp2_S3.1 -14.526,84.332 -12.478,86.38 VRamp1_S3.1
NetOp_S3_6: Op_S3.6 VRef1_S3.1 VRef2_S3.2 | length 15.9
  Top Layer w0.6: Op_S3.6 -10.619,73.655 -10.97,74.006 -10.97,76.617 -10.201,77.386 -7.38,77.386 -6.114,76.12 -5.52,76.12 -4.77,75.37 VRef1_S3.1 VRef2_S3.2
NetOp_S4_1: Op_S4.1 Op_S4.5 VRamp2_S4.2 | length 13.4
  Top Layer w0.6: Op_S4.5 8.715,76.497 10.366,74.846 10.366,73.068 10.747,72.687 Op_S4.1 13.666,72.687 14.793,71.56 VRamp2_S4.2
NetOp_S4_2: Op_S4.2 VRamp1_S4.1 VRamp2_S4.1 | length 16.2
  Top Layer w0.6: Op_S4.2 17.439,73.957 17.836,73.56 VRamp2_S4.1 19.413,73.56 19.764,73.209 19.764,66.956 18.132,65.324 18.132,65.174 17.882,64.924 VRamp1_S4.1
NetOp_S4_6: Op_S4.6 VRef1_S4.1 VRef2_S4.2 | length 13.2
  Top Layer w0.6: VRef2_S4.2 3,67.376 2.746,67.63 VRef1_S4.1 2.889,75.227 Op_S4.6
NetOp_S5_1: Op_S5.1 Op_S5.5 VRamp2_S5.2 | length 11.6
  Top Layer w0.6: VRamp2_S5.2 -29.859,118.502 -29.51,118.153 -27.846,118.153 -26.31,116.617 -26.31,116.473 -26.21,116.373 -26.21,115.075 -25.478,114.343 Op_S5.5
NetOp_S5_2: Op_S5.2 VRamp1_S5.1 VRamp2_S5.1 | length 13
  Top Layer w0.6: VRamp2_S5.1@-32.597,116.494 VRamp2_S5.1 -30.989,116.502 -30.608,116.883 Op_S5.2 -27.99,116.883 -27.31,116.203 -27.31,109.29 VRamp1_S5.1 VRamp1_S5.1@-27.33,109.12
NetOp_S5_6: Op_S5.6 VRef1_S5.1 VRef2_S5.2 | length 15.2
  Top Layer w0.6: Op_S5.6 -22.527,115.613 -20.384,113.47 VRef1_S5.1 -20.376,107.366 -15.296,107.366 VRef2_S5.2
NetOp_S6_1: Op_S6.1 Op_S6.5 VRamp2_S6.2 | length 14.6
  Top Layer w0.6: Op_S6.5 25.096,107.485 27.892,104.689 27.892,104.153 28.37,103.675 Op_S6.1 36.639,103.675 VRamp2_S6.2
NetOp_S6_2: Op_S6.2 VRamp1_S6.1 VRamp2_S6.1 | length 12.3
  Top Layer w0.6: Op_S6.2 35.639,104.945 36.262,105.568 36.532,105.568 VRamp2_S6.1 ; VRamp1_S6.1 36.782,106.041 VRamp2_S6.1@37.005,105.818
NetOp_S6_6: Op_S6.6 VRef1_S6.1 VRef2_S6.2 | length 17.8
  Top Layer w0.6: VRef2_S6.2 VRef1_S6.1@24.662,112.676 ; Op_S6.6 22.939,106.215 21.542,107.612 21.542,109.556 VRef1_S6.1@24.662,112.676 ; VRef1_S6.1 24.948,112.962 VRef1_S6.1@24.662,112.676
S1Out: Op_S1.7 P0.6 | length 50.2
  Top Layer w0.6: P0.6 -23.416,44.874 -23.416,49.857 -23.767,50.208 -28.267,50.208 -29.348,49.126 -29.348,39.813 -22.605,33.07 -22.605,25.419 -24.348,23.676 -24.348,18.503 -23.938,18.093 -23.618,18.093 -23.348,17.823 Op_S1.7
S2Out: Op_S2.7 P0.7 | length 67.8
  Top Layer w0.6: P0.7 -23.924,36.492 v1(-21.13,36.492) ; v1(14.732,13.716) 14.86,13.588 14.86,13.121 17.27,10.711 Op_S2.7
  Bottom Layer w0.6: v1(-21.13,36.492) -20.368,35.73 -20.368,20.333 -17.123,17.089 11.359,17.089 v1(14.732,13.716)
S3Out: Op_S3.7 P0.8 | length 50.4
  Top Layer w0.6: P0.8 -22.4,43.35 -22.4,50.462 -23.162,51.224 -25.772,51.224 -26.123,51.575 -26.123,52.073 -14.018,64.178 -14.018,70.109 -12.742,71.385 -8.012,71.385 -7.602,71.795 -7.602,74.245 -8.282,74.925 Op_S3.7
S4Out: Op_S4.7 P1.3 | length 33.9
  Top Layer w0.6: v1(4.27,73.322) 4.451,73.322 5.086,73.957 Op_S4.7
  Bottom Layer w0.6: v1(4.27,73.322) 5.7,74.752 27.696,74.752 29.125,76.182 29.125,78.336 27.663,79.799 P1.3
S5Out: Op_S5.7 P1.5 | length 70.2
  Top Layer w0.6: Op_S5.7 -22.383,116.883 -18.203,112.703 -18.203,111.289 v1(-18.082,111.168)
  Bottom Layer w0.6: v1(-18.082,111.168) 3.452,111.168 29.125,85.495 29.125,83.826 P1.5
S6Out: Op_S6.7 P1.6 | length 26
  Top Layer w0.6: Op_S6.7 25.733,104.945 26.114,104.564 26.114,95.579 23.611,93.075 23.611,83.826 P1.6
pads on no net: J13.1 J13.2 J13.6 J13.7 J13.10 J18.4 J18.5 J18.8 P0.3 P0.4 P0.5 P1.1 P1.2 P1.4 P1.7 P1.8 P2.1 P2.2 P2.3 P2.4 P2.5 P2.6 P2.7 P2.8 P3.1 P3.2 P3.3 P3.4 P3.7 P3.8 P12.1 P12.2 P12.5 P12.6 P12.7 P12.8 P15.1 P15.4 P15.5 P15.6

## Keep-outs
Keep-Out Layer:
  lines w0.254: -43.99,-0.084 43.894,-0.084 43.894,126.916 -43.99,126.916 -43.99,-0.084

## Silkscreen, mask and mechanical layers (free items; w line width, h text height)
Top Overlay:
  text "3.1" at -23.289,93.642 h1.02
  text "3.0" at -32.433,93.388 h1.02
  text "3.2" at -32.306,91.102 h1.02
  text "3.3" at -23.416,91.102 h1.02
  text "3.5" at -23.416,88.562 h1.02
  text "3.4" at -32.306,88.308 h1.02
  text "1.7" at 21.669,86.657 h1.02
  text "3.7" at -23.67,86.149 h1.02
  text "3.6" at -32.56,85.26 h1.02
  text "1.6" at 29.67,84.752 h1.02
  text "1.5" at 20.526,81.958 h1.02
  text "1.4" at 29.543,81.958 h1.02
  text "Ibat" at -32.814,81.45 h1.02
  text "Vbat" at -23.162,81.196 h1.02
  text "1.3" at 20.653,79.418 h1.02
  text "1.2" at 29.67,79.291 h1.02
  text "D1" at -31.036,78.783 h1.02
  text "IN2" at -23.289,78.656 h1.02
  text "1.1" at 20.907,76.751 h1.02
  text "1.0" at 29.67,76.751 h1.02
  text "IN1" at -32.052,76.37 h1.02
  text "SLW" at -23.289,76.243 h1.02
  text "INV" at -32.433,73.703 h1.02
  text "EN" at -23.289,73.576 h1.02
  text "ENCD" at 29.67,71.798 h1.02
  text "ENCD" at 19.383,71.671 h1.02
  text "D2" at -31.544,71.036 h1.02
  text "D2" at 29.543,68.877 h1.02
  text "EN" at 21.161,66.718 h1.02
  text "INV" at 29.543,66.591 h1.02
  text "15.1" at -23.416,66.337 h1.02
  text "15.0" at -33.195,65.956 h1.02
  text "SLW" at 20.399,64.178 h1.02
  text "IN1" at 29.67,64.051 h1.02
  text "15.2" at -33.195,63.797 h1.02
  text "15.3" at -23.416,63.67 h1.02
  text "IN2" at 20.653,61.511 h1.02
  text "D1" at 29.67,61.384 h1.02
  text "15.4" at -33.195,61.13 h1.02
  text "15.5" at -23.416,61.13 h1.02
  text "ENCD" at -33.449,58.59 h1.02
  text "ENCD" at -23.416,58.463 h1.02
  text "12.0" at 19.764,56.685 h1.02
  text "Group 4" at -9.7,56.558 h2.54
  text "12.1" at 29.416,56.558 h1.02
  text "12.2" at 19.764,54.272 h1.02
  text "12.3" at 29.543,53.764 h1.02
  text "12.4" at 19.891,51.605 h1.02
  text "12.5" at 29.67,51.605 h1.02
  text "12.6" at 19.637,49.065 h1.02
  text "12.7" at 29.797,49.065 h1.02
  text "0.1" at -23.162,47.922 h1.02
  text "0.0" at -32.433,47.668 h1.02
  text "0.2" at -32.56,45.128 h1.02
  text "0.3" at -23.289,45.128 h1.02
  text "2.7" at 20.145,45.128 h1.02
  text "2.6" at 29.67,44.239 h1.02
  text "2.5" at 20.399,43.35 h1.02
  text "0.5" at -23.543,43.223 h1.02
  text "0.4" at -32.56,42.588 h1.02
  text "2.4" at 29.67,41.572 h1.02
  text "0.6" at -32.306,40.683 h1.02
  text "0.7" at -23.543,39.032 h1.02
  text "2.3" at 20.145,38.778 h1.02
  text "2.2" at 29.67,38.778 h1.02
  text "2.1" at 20.653,36.492 h1.02
  text "2.0" at 29.543,36.238 h1.02
  text "-" at -30.401,32.174 h1.52 r180
  text "-" at -21.638,32.174 h1.52 r180
  text "-" at 22.812,32.174 h1.52 r180
  text "-" at 30.813,32.174 h1.52 r180
  text "+" at -30.147,28.364 h1.52 r90
  text "+" at 23.066,28.364 h1.52 r90
  text "+" at -21.638,28.11 h1.52 r90
  text "+" at 31.067,28.11 h1.52 r90